# Altium PCB AirScoutPCBV2.0.PcbDoc
Units mm, origin at the board's own origin, x right, y up, seen from the top; angles counter-clockwise.
Board outline 70 x 95 mm, 4 copper layers (TOP, GND/S1, SRC/S2, BOTTOM), stack 0.603 mm thick; 62 components, 40 nets, 233 pads, 124 vias.
Unrouted connection lines stored in the file: 178.
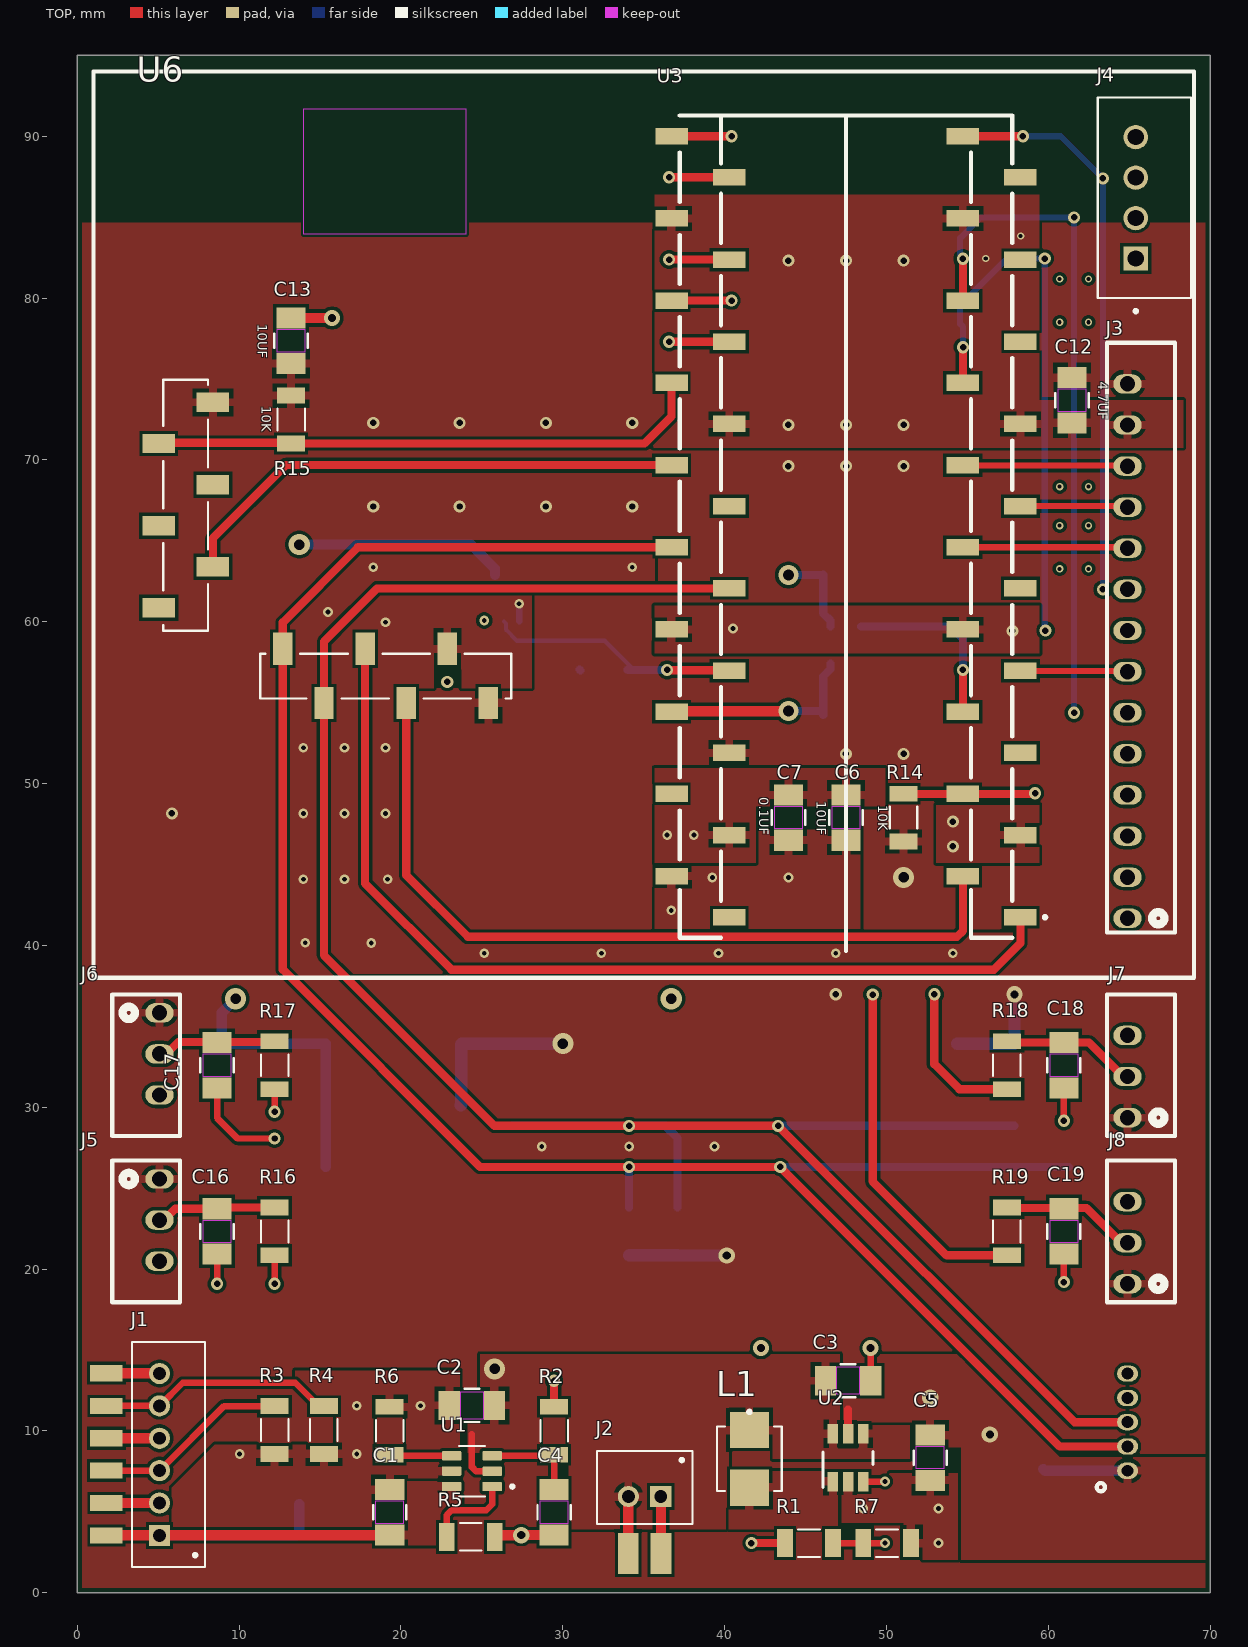
[diagram p0: TOP view]
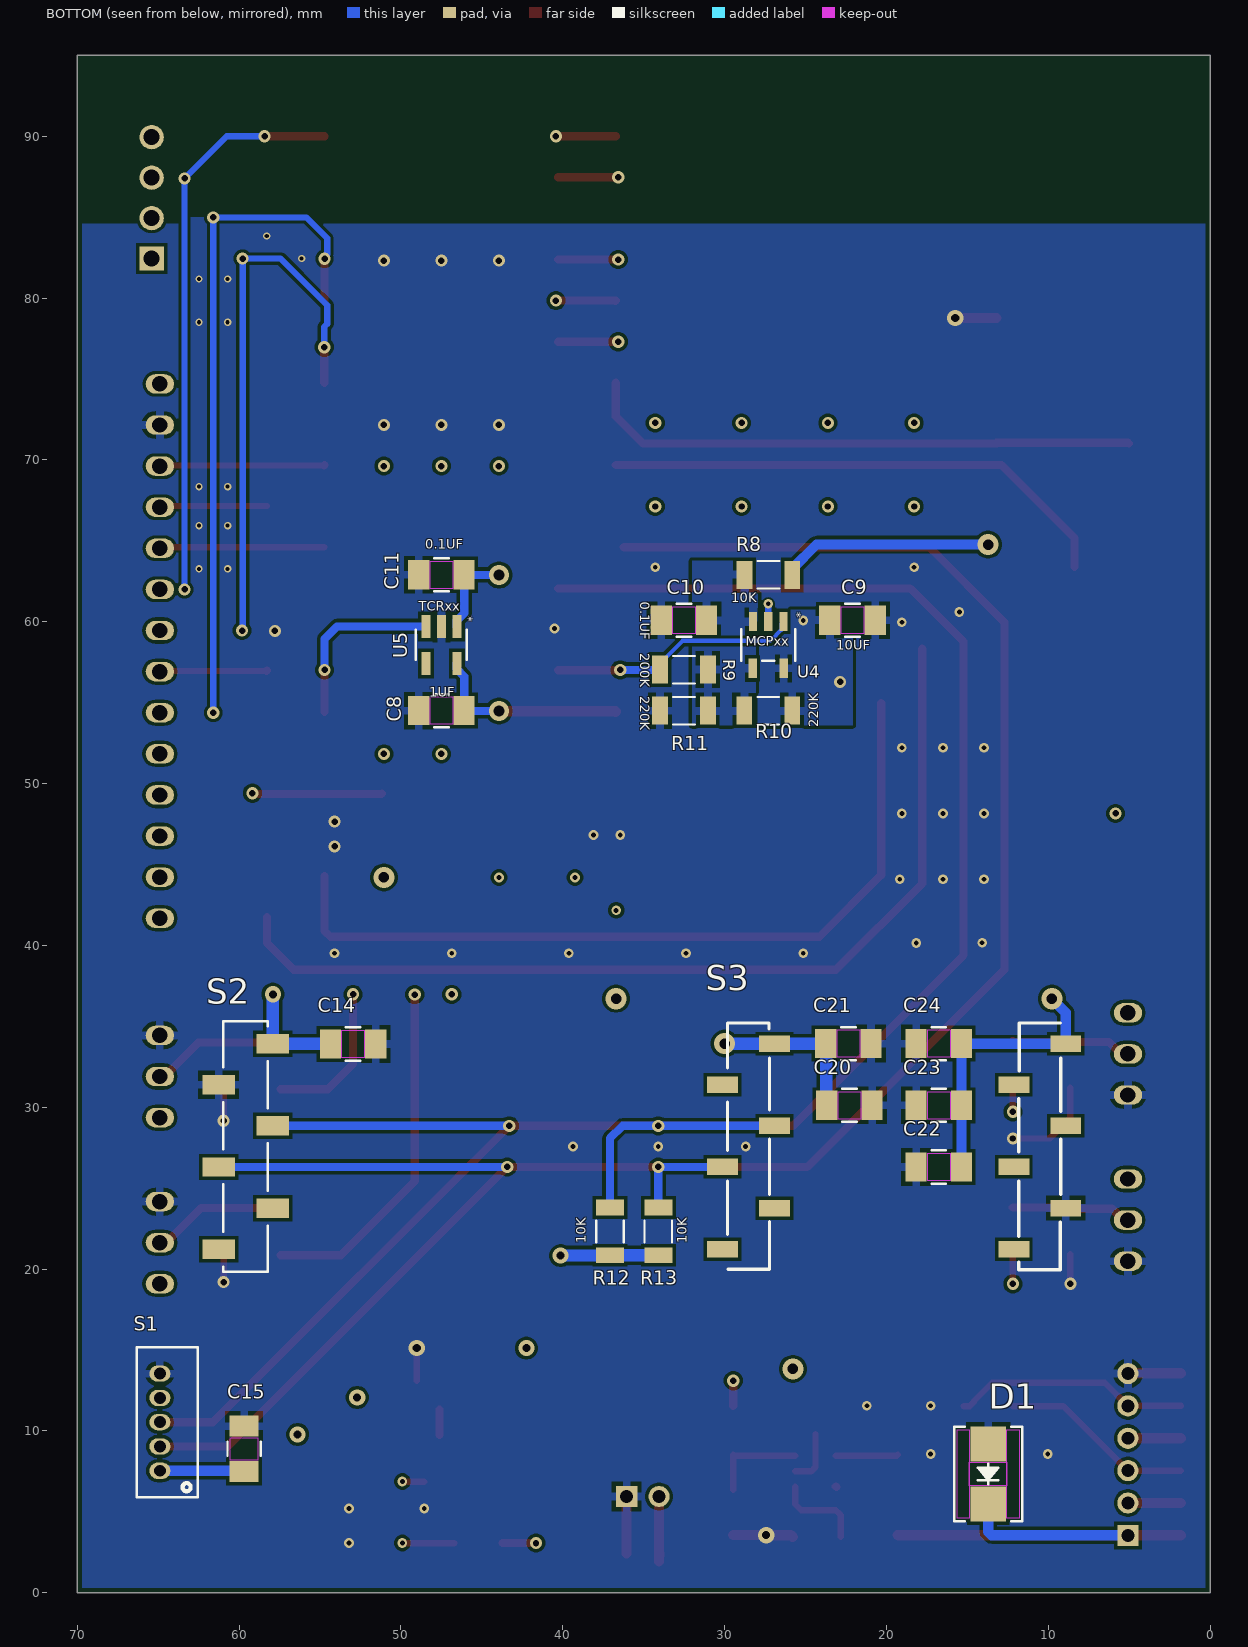
[diagram p1: BOTTOM view, seen from below]
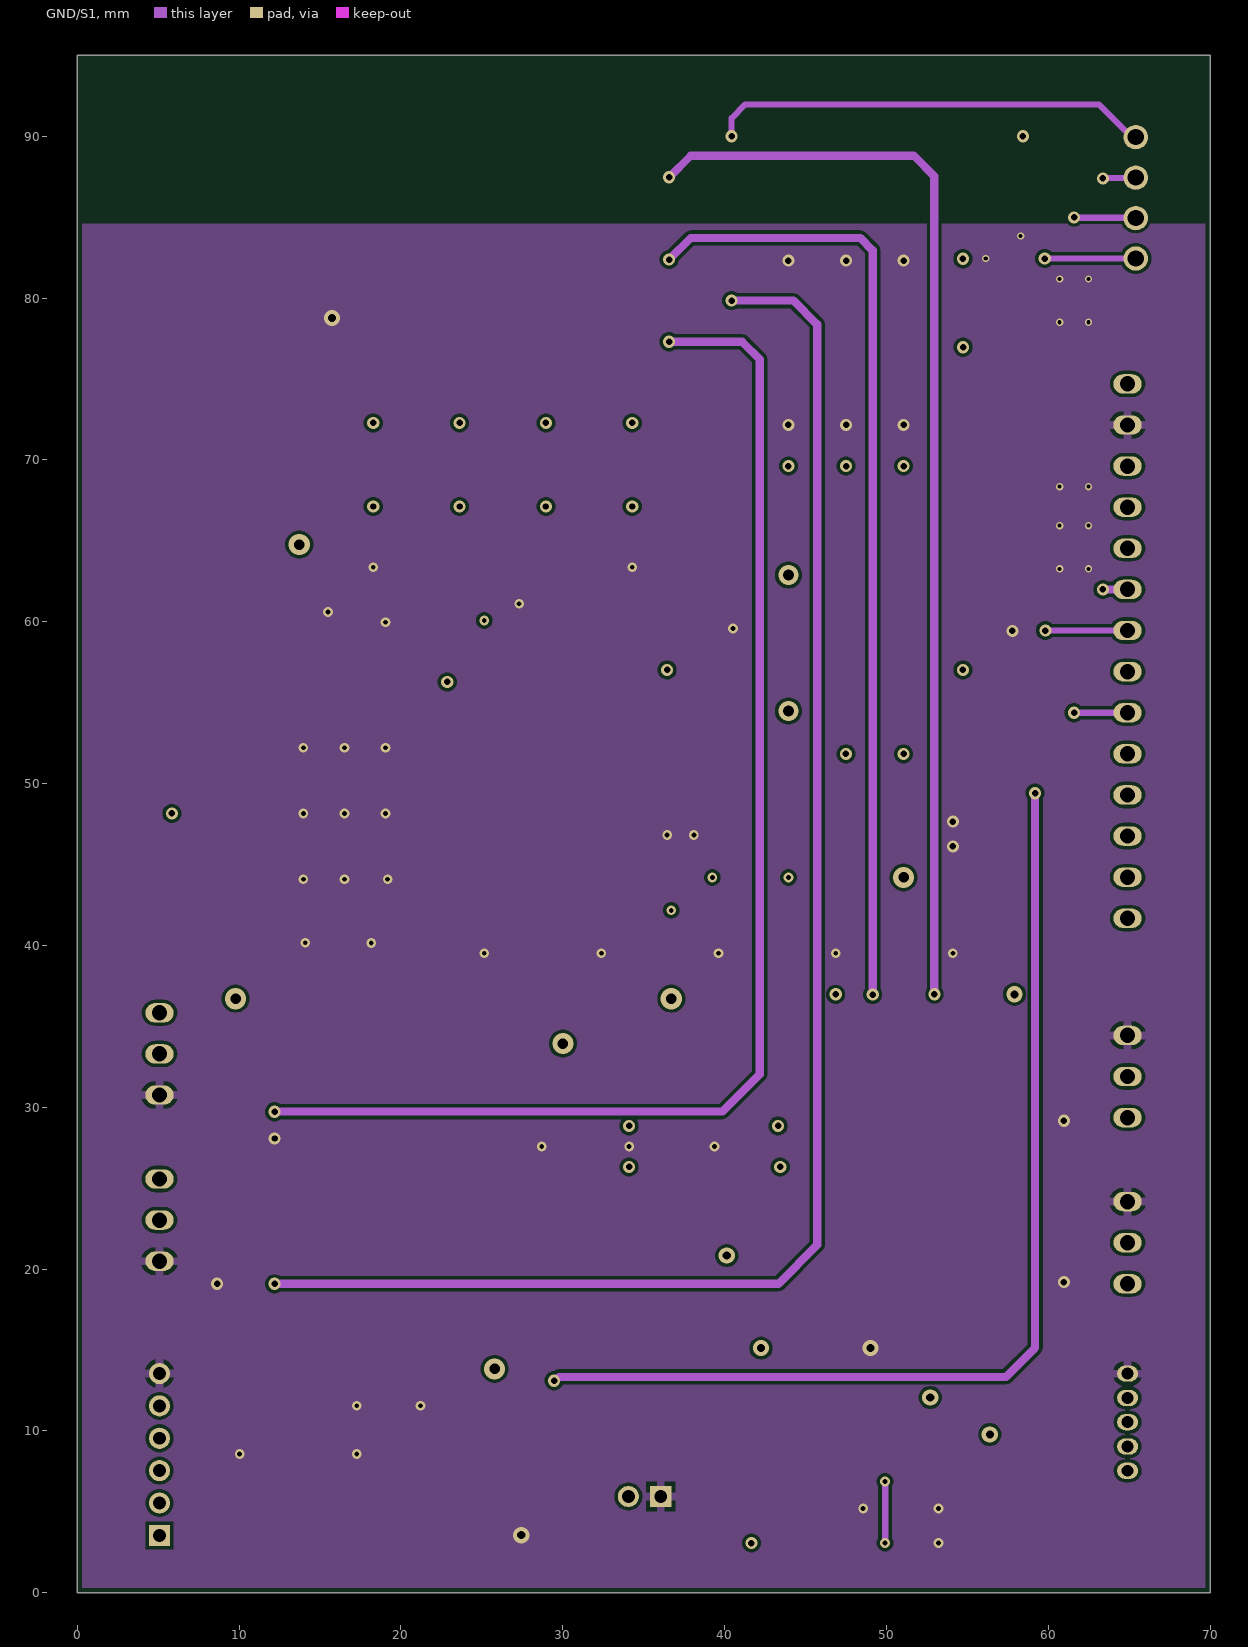
[diagram p2: GND/S1]
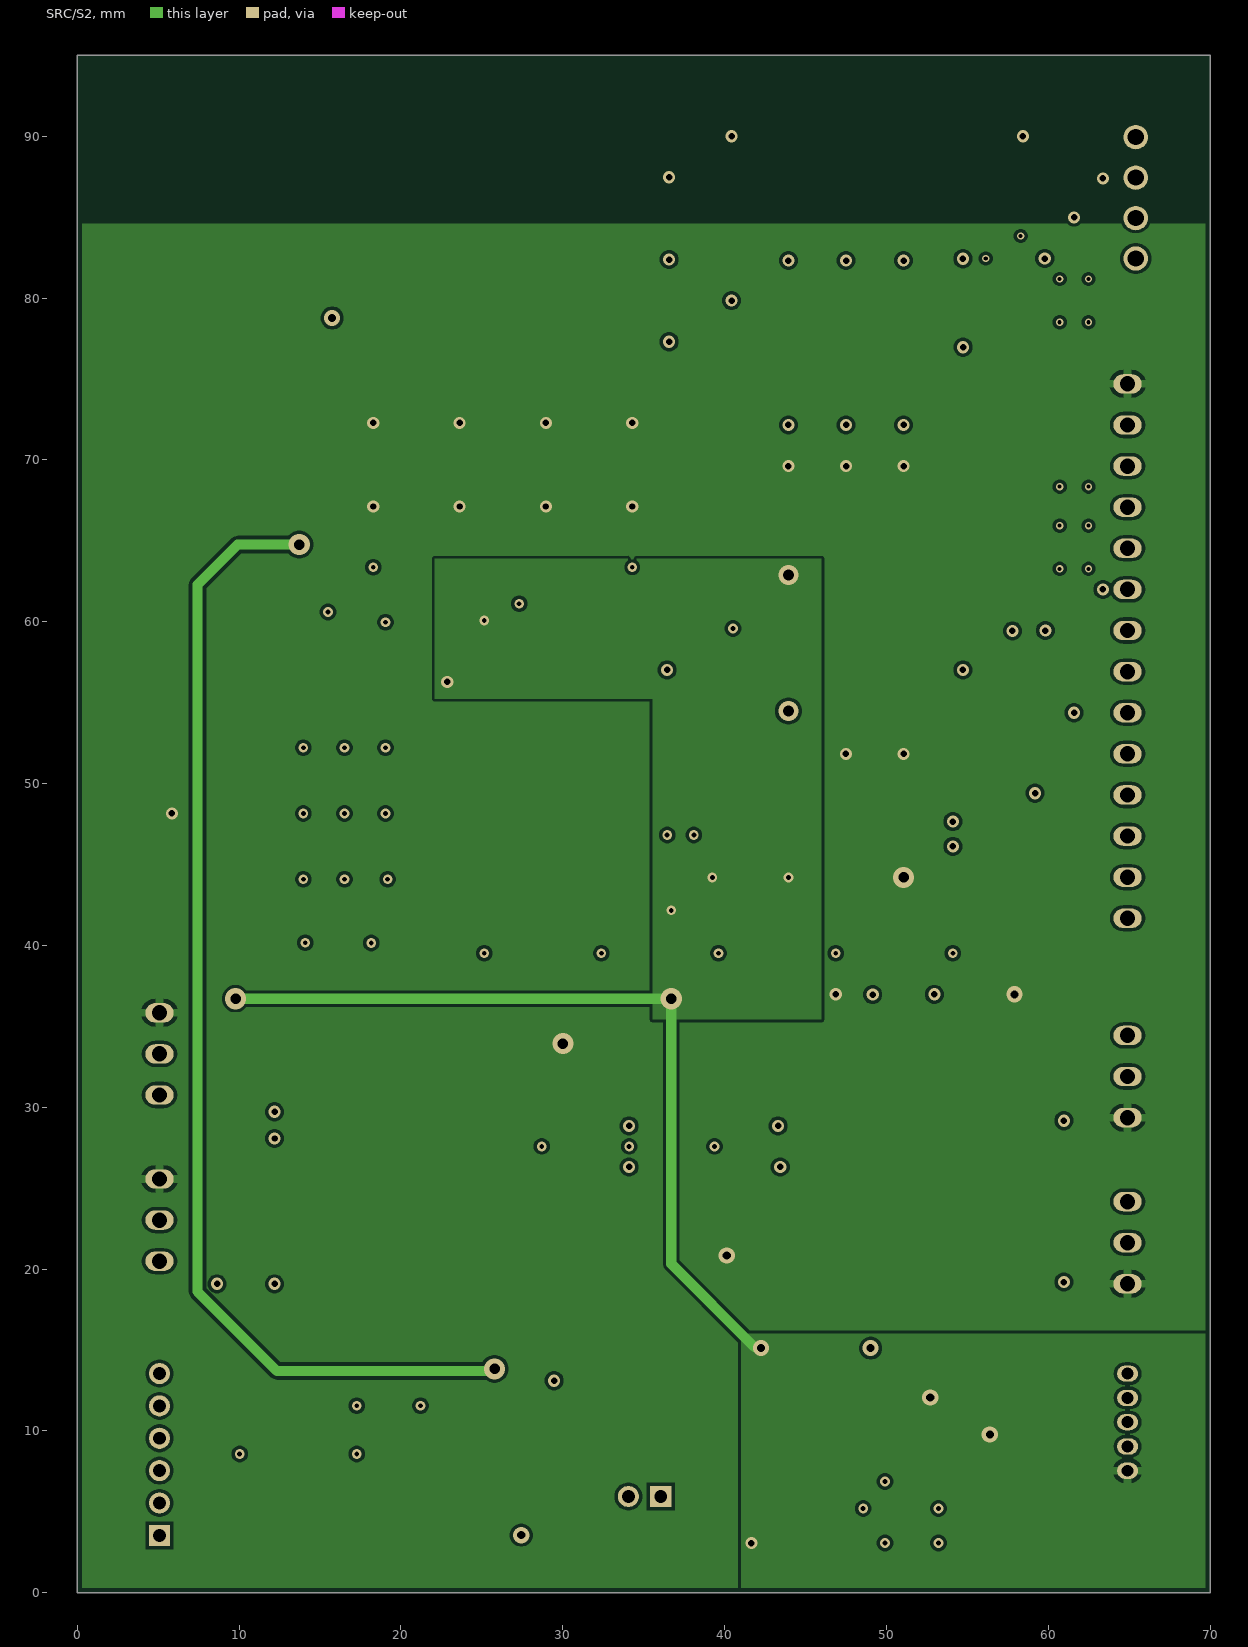
[diagram p3: SRC/S2]

## Layer stack, top to bottom
Top Solder: solder mask 0.0102, Solder Resist, Dk 3.5
TOP: signal copper 0.0356
Dielectric 2: prepreg 0.0711, PP-006, Dk 4.1
GND/S1: signal copper 0.035
Dielectric 1: dielectric 0.32, FR-4, Dk 4.8
SRC/S2: signal copper 0.035
Dielectric 3: prepreg 0.0711, PP-006, Dk 4.1
BOTTOM: signal copper 0.0356
Bottom Solder: solder mask 0.0102, Solder Resist, Dk 3.5

## Board outline
0,0 0,95 70,95 70,0

## Design rules (kind name [scope] priority, off if disabled: settings)
BoardOutlineClearance [All] p1: gap=0.3 ignorepadtopadclearanceinfootprint=FALSE except(0.4: Arc-SplitBarrior Arc-SplitContinuation Track-SplitBarrior Track-SplitContinuation SMDPad-SplitBarrior SMDPad-SplitContinuation THPad-SplitBarrior THPad-SplitContinuation Via-SplitBarrior Via-SplitContinuation Fill-SplitBarrior Fill-SplitContinuation Poly-SplitBarrior Poly-SplitContinuation Region-SplitBarrior Region-SplitContinuation Text-SplitBarrior Text-SplitContinuation)
Clearance "Clearance Different Nets" [All] p1: gap=0.2 ignorepadtopadclearanceinfootprint=FALSE except(0.089: Arc-Arc Arc-Track Arc-SMDPad Track-Track Track-SMDPad; 0.127: SMDPad-SMDPad SMDPad-Via THPad-Via Via-Via; 0.254: Arc-Via Arc-Text Track-Via Track-Text SMDPad-Text THPad-Text Via-Text Fill-Text Poly-Text Region-Text Text-Text; 0.5: THPad-THPad Via-Hole)
Clearance "Clearance Same Nets" [All] p2: gap=0.2 ignorepadtopadclearanceinfootprint=FALSE except(0.089: Arc-Arc Arc-Track Arc-SMDPad Track-Track Track-SMDPad SMDPad-SMDPad; 0.127: SMDPad-Via THPad-Via; 0.254: Arc-Via Arc-Text Track-Via Track-Text SMDPad-Text THPad-Text Via-Via Via-Text Fill-Text Poly-Text Region-Text Text-Text)
Clearance "Clearance Bottom Layer" [OnLayer('Bottom Layer')] p3: gap=0.203 ignorepadtopadclearanceinfootprint=TRUE except(0.254: Arc-Text Track-Text SMDPad-Text THPad-Text Via-Text Fill-Text Poly-Text Region-Text Text-Text)
Clearance "Clearance Top Layer" [OnLayer('Top Layer')] p4: gap=0.203 ignorepadtopadclearanceinfootprint=TRUE except(0.254: Arc-Text Track-Text SMDPad-Text THPad-Text Via-Text Fill-Text Poly-Text Region-Text Text-Text)
HoleSize [All] p1: absolutevalues=TRUE maxlimit=6.3 minlimit=0.2 maxpercent=80.000 minpercent=20.000
MinimumAnnularRing [All] p1: minimumring=0.13
MinimumSolderMaskSliver [All] p1: minsoldermaskwidth=0.1
PolygonConnect PolygonConnect_1 [All] p1: thpad.connectstyle=Relief thpad.reliefconductorwidth=0.508 thpad.reliefentries=4 thpad.polygonreliefangle="90 Angle" thpad.airgapwidth=0.254 smdpad.connectstyle=Relief smdpad.reliefconductorwidth=0.508 smdpad.reliefentries=4 smdpad.polygonreliefangle="90 Angle" smdpad.airgapwidth=0.254 via.connectstyle=Direct via.reliefconductorwidth=0.508 via.reliefentries=4 via.polygonreliefangle="90 Angle" via.airgapwidth=0.254
RoutingCorners [All] p1: cornerstyle=Round minsetback=2.54 maxsetback=2.54
RoutingVias [All] p1: holewidth=0.5 width=1 viastyle="Through Hole" minholewidth=0.2 minwidth=0.35 maxholewidth=1 maxwidth=2
SilkToSilkClearance [All] p1: silktosilkclearance=0.1
SilkToSolderMaskClearance [IsPad] p1: minsilkscreentomaskgap=0.1 clearancetoexposedcopper=TRUE
SolderMaskExpansion [All] p1: expansion=0.102 istentingtop=FALSE
SupplyNets "Schematic Supply Nets_30" [InNet('I2C/SCL')] p1: voltage=0.000
SupplyNets "Schematic Supply Nets_29" [InNet('SPI/CS-DIS')] p2: voltage=0.000
SupplyNets "Schematic Supply Nets_28" [InNet('VCC')] p3: voltage=0.000
SupplyNets "Schematic Supply Nets_27" [InNet('SPI/CS-SD')] p4: voltage=0.000
SupplyNets "Schematic Supply Nets_26" [InNet('VIN-')] p5: voltage=0.000
SupplyNets "Schematic Supply Nets_25" [InNet('5VCC')] p6: voltage=0.000
SupplyNets "Schematic Supply Nets_24" [InNet('CC1')] p7: voltage=0.000
SupplyNets "Schematic Supply Nets_23" [InNet('3V3')] p8: voltage=0.000
SupplyNets "Schematic Supply Nets_22" [InNet('FB')] p9: voltage=0.000
SupplyNets "Schematic Supply Nets_21" [InNet('UART/RX')] p10: voltage=0.000
SupplyNets "Schematic Supply Nets_20" [InNet('RST')] p11: voltage=0.000
SupplyNets "Schematic Supply Nets_19" [InNet('LED')] p12: voltage=0.000
SupplyNets "Schematic Supply Nets_18" [InNet('SPI/MISO')] p13: voltage=0.000
SupplyNets "Schematic Supply Nets_17" [InNet('ADC2')] p14: voltage=0.000
SupplyNets "Schematic Supply Nets_16" [InNet('GND')] p15: voltage=0.000
SupplyNets "Schematic Supply Nets_15" [InNet('UART/TX')] p16: voltage=0.000
SupplyNets "Schematic Supply Nets_14" [InNet('RESET')] p17: voltage=0.000
SupplyNets "Schematic Supply Nets_13" [InNet('I2C/SDA')] p18: voltage=0.000
SupplyNets "Schematic Supply Nets_12" [InNet('DC')] p19: voltage=0.000
SupplyNets "Schematic Supply Nets_11" [InNet('CONT')] p20: voltage=0.000
SupplyNets "Schematic Supply Nets_10" [InNet('TCH4')] p21: voltage=0.000
SupplyNets "Schematic Supply Nets_9" [InNet('3V3-REF')] p22: voltage=0.000
SupplyNets "Schematic Supply Nets_8" [InNet('TCH2')] p23: voltage=0.000
SupplyNets "Schematic Supply Nets_7" [InNet('TCH3')] p24: voltage=0.000
SupplyNets "Schematic Supply Nets_6" [InNet('TCH1')] p25: voltage=0.000
SupplyNets "Schematic Supply Nets_5" [InNet('CC2')] p26: voltage=0.000
SupplyNets "Schematic Supply Nets_4" [InNet('VBUS')] p27: voltage=0.000
SupplyNets "Schematic Supply Nets_3" [InNet('SPI/SCK')] p28: voltage=0.000
SupplyNets "Schematic Supply Nets_2" [InNet('EXTIN')] p29: voltage=0.000
SupplyNets "Schematic Supply Nets_1" [InNet('SPI/MOSI')] p30: voltage=0.000
SupplyNets "Schematic Supply Nets" [InNet('CHG')] p31: voltage=0.000
Width [All] p1: maxlimit=2.54 minlimit=0.089 preferedwidth=0.381
25 further rules are at their usual default settings.

## Components (designator, comment, footprint, x,y, rotation, side; value= is the part's Value field where it differs from the comment)
C1 "C1206C105K3RACTU" CAPC340180_140N_KEM 19.304,4.972 r270 top value=1uF
C2 "C1206C105K3RACTU" CAPC340180_140N_KEM 24.384,11.576 r0 top value=1uF
C3 "CL31B225KBHNNNE" CAPC340180_140N_KEM 47.625,13.1 r180 top value=2.2uF
C4 "C1206C104K5RACTU" CAPC340180_140N_KEM 29.464,4.972 r90 top value=0.1uF
C5 "CL31B475KBHNFNE" CAPC340180_140N_KEM 52.705,8.344 r90 top value=4.7uF
C6 "CL31B106KAHNNNE" CAPC340180_140N_KEM 47.498,47.898 r270 top value=10uF
C7 "C1206C104K5RACTU" CAPC340180_140N_KEM 43.942,47.898 r270 top value=0.1uF
C8 "C1206C105K3RACTU" CAPC340180_140N_KEM 47.498,54.502 r180 bottom value=1uF
C9 "CL31B106KAHNNNE" CAPC340180_140N_KEM 22.098,60.09 r0 bottom value=10uF
C10 "C1206C104K5RACTU" CAPC340180_140N_KEM 32.512,60.09 r180 bottom value=0.1uF
C11 "C1206C104K5RACTU" CAPC340180_140N_KEM 47.498,62.9 r180 bottom value=0.1uF
C12 "CL31B475KBHNFNE" CAPC340180_140N_KEM 61.468,73.685 r90 top value=4.7uF
C13 "CL31B106KAHNNNE" CAPC340180_140N_KEM 13.208,77.362 r270 top value=10uF
C14 "CL31B106KAHNNNE" CAPC340180_140N_KEM 52.959,33.909 r0 bottom value=10uF
C15 "CL31B106KAHNNNE" CAPC340180_140N_KEM 59.69,8.89 r270 bottom value=10uF
C16 "C1206C104K5RACTU" CAPC340180_140N_KEM 8.636,22.326 r90 top value=0.1uF
C17 "C1206C104K5RACTU" CAPC340180_140N_KEM 8.636,32.594 r90 top value=0.1uF
C18 "C1206C104K5RACTU" CAPC340180_140N_KEM 60.96,32.594 r90 top value=0.1uF
C19 "C1206C104K5RACTU" CAPC340180_140N_KEM 60.96,22.326 r90 top value=0.1uF
C20 "CL31B106KAHNNNE" CAPC340180_140N_KEM 22.289,30.118 r0 bottom value=10uF
C21 "C1206C104K5RACTU" CAPC340180_140N_KEM 22.352,33.928 r0 bottom value=0.1uF
C22 "CL31A476MQHNNNE" CAPC340180_140N_KEM 16.764,26.308 r180 bottom value=47uF
C23 "CL31B106KAHNNNE" CAPC340180_140N_KEM 16.764,30.118 r180 bottom value=10uF
C24 "C1206C104K5RACTU" CAPC340180_140N_KEM 16.764,33.928 r180 bottom value=0.1uF
D1 "SMBJ14CA-13-F" SMB_DIO 13.716,7.337 r90 bottom
J1 "B6B-PH-K-S" JST_B6B-PH-K-S 5.63,8.544 r270 top
J2 "B02B-PASK-1" JST_B2B-PH-K-S 35.052,6.496 r0 top
J3 "0705430013" CONN_14POL_SAMTEC 64.897,41.675 r270 top
J4 "4x1 vertical Connector Box" JST_B4B-XH-A 65.93,86.192 r270 top
J5 "0705430002" CONN_3POL_SAMTEC 5.08,25.565 r90 top
J6 "0705430002" CONN_3POL_SAMTEC 5.08,35.833 r90 top
J7 "0705430002" CONN_3POL_SAMTEC 64.897,29.356 r270 top
J8 "0705430002" CONN_3POL_SAMTEC 64.897,19.088 r270 top
L1 "PA4332.103NLT" IND_FDSD0420-H-100M=P3 41.529,8.274 r270 top
R1 "RC1206FR-0710KL" RESC3116X65N 45.212,3.067 r180 top value=10k
R2 "RC1206FR-0710KL" RESC3116X65N 29.464,10.008 r270 top value=10k
R3 "RMCF1206JT5K10" RESC3116X65N 12.192,10.052 r90 top value=5k1
R4 "RMCF1206JT5K10" RESC3116X65N 15.24,10.052 r90 top value=5k1
R5 "RC1206FR-0710KL" RESC3116X65N 24.307,3.448 r180 top value=10k
R6 "RNCP1206FTD1K00" RESC3116X65N 19.304,10.008 r270 top value=1k
R7 "RMCF1206JT56K0" RESC3116X65N 50.038,3.067 r180 top value=56k
R8 "RC1206FR-0710KL" RESC3116X65N 27.292,62.9 r180 bottom value=10k
R9 "RC1206JR-07200KL" RESC3116X65N 32.512,57.042 r0 bottom value=200k
R10 "RC1206JR-07220KL" RESC3116X65N 27.305,54.502 r180 bottom value=220k
R11 "RC1206JR-07220KL" RESC3116X65N 32.512,54.502 r180 bottom value=220k
R12 "RC1206FR-0710KL" RESC3116X65N 37.084,22.326 r270 bottom value=10k
R13 "RC1206FR-0710KL" RESC3116X65N 34.099,22.326 r270 bottom value=10k
R14 "RC1206FR-0710KL" RESC3116X65N 51.054,47.898 r270 top value=10k
R15 "RC1206FR-0710KL" RESC3116X65N 13.208,72.492 r90 top value=10k
R16 "RC1206FR-0710KL" RESC3116X65N 12.192,22.326 r270 top value=10k
R17 "RC1206FR-0710KL" RESC3116X65N 12.192,32.594 r270 top value=10k
R18 "RC1206FR-0710KL" RESC3116X65N 57.443,32.594 r270 top value=10k
R19 "RC1206FR-0710KL" RESC3116X65N 57.443,22.326 r270 top value=10k
S1 "B5B-ZR" CONN5_B5B-ZR_JST 64.897,7.536 r270 bottom
S2 "SSM-106-F-SV" PIM357 61.088,35.578 r270 bottom
S3 "SSM-106-F-SV" IFX-SMD-LG-MLGA-14-1-V_MODUL 31.379,18.428 r180 bottom locked
U1 "BQ21040DBVR" SOT95P280X145-6N 24.384,7.512 r180 top
U2 "TLV61046ADBVR" DBV0006A_M 47.625,8.344 r90 top
U3 "SSM-120-L-SV-BE-K-TR" "PicoW SC019" 47.5,66 r180 top locked
U4 "MCP6006T-E/OT" SOT23-5-AP2202K_DIO-M 27.305,58.566 r270 bottom
U5 "TCR2EF33,LM(CT" "SOT-25   SMV_TOS" 47.498,58.566 r270 bottom
U6 "FM20206VBNN; SSM-106-F-SV" CAM8MQ-Mod 5.006,91.952 r270 top

## Footprints (in the part's own frame and the unit in brackets; to place one, negate y for a bottom-side part, rotate by r counter-clockwise, add the part's x,y. Pads: shape width x height; smd on the part's side, far side on the other; paste and mask are expansions set on the pad)
CAM8MQ-Mod [mm] "For SMD Soldering"
  rect 1.2x2 smd paste+0 mask+0.025: 1(18.4,3.376) 2(20.94,0.024) 3(23.48,3.376) 4(26.02,0.024) 5(28.56,3.376) 6(31.1,0.024)
  rect 2x1.2 smd paste+0 mask+0.025: 7(36.976,20.4) 8(33.624,17.86) 9(36.976,15.32) 10(33.624,12.78) 11(36.976,10.24) 12(33.624,7.7)
  TOP keep-out region: 0.25,19 8,19 8,9 0.25,9
  silkscreen extent 17,0.3 36.7,21.8, body extent 17.14,-0.5 37.58,21.59, height 7.49
CAPC340180_140N_KEM [mm] "Caseform: 1206 Imperial; for Caps"
  rect 1.306x1.8 smd paste+0 mask+0: 1(-1.403,0) 2(1.403,0)
  TOP keep-out region: -0.699,-0.849 -0.699,0.849 0.699,0.849 0.699,-0.849
  silkscreen extent -0.44,-1.03 0.44,1.03, body extent -1.7,-0.9 1.7,0.9, height 1.4
CONN5_B5B-ZR_JST [mm]
  oval 1x1.3 hole 0.737 paste-2539.97: 1(0,0) 2(-1.5,0) 3(-3,0) 4(-4.5,0) 5(-6,0)
  silkscreen extent -7.62,-1.43 1.62,2.33, body extent -7.5,-1.24 1.5,2.26, height 4.5
CONN_3POL_SAMTEC [mm] "0705430013"
  oval 1.2x1.75 hole 0.95: 1(0,0) 2(-2.54,0) 3(-5.08,0)
  silkscreen extent -7.62,-1.27 1.14,2.92, body extent -7.23,-1.27 0.88,5.08, height 5.46
CONN_14POL_SAMTEC [mm] "0705430013"
  oval 1.2x1.75 hole 0.95: 1(0,0) 2(-2.54,0) 3(-5.08,0) 4(-7.62,0) 5(-10.16,0) 6(-12.7,0) 7(-15.24,0) 8(-17.78,0) 9(-20.32,0) 10(-22.86,0) 11(-25.4,0) 12(-27.94,0) 13(-30.48,0) 14(-33.02,0)
  silkscreen extent -35.56,-1.27 0.89,2.92, body extent -35.29,-1.27 0.75,5.08, height 5.97
DBV0006A_M [mm]
  rect 1.2x0.65 smd paste+0 mask+0.051: 1(-1.475,0.95) 2(-1.475,0) 3(-1.475,-0.95) 4(1.475,-0.95) 5(1.475,0) 6(1.475,0.95)
  silkscreen extent -1.83,-1.55 0.38,1.55, body extent -1.4,-1.45 1.4,1.45, height 1.2
IFX-SMD-LG-MLGA-14-1-V_MODUL [mm] "Module, 2.54 mm Pitch, 14 Pin, 14.00 mm W X 13.80 mm L X 7.68 mm H Body"
  rect 1.905x1.02 smd: 1(4.455,15.5) 2(1.25,12.96) 3(4.455,10.42) 4(1.25,7.88) 5(4.455,5.34) 6(22.455,5.34) 7(19.25,7.88) 8(22.455,10.42) 9(19.25,12.96) 10(22.455,15.5) 11(1.25,2.8) 12(19.25,2.8)
  silkscreen extent 1.55,1.53 22.15,16.77, body extent 0.77,1.52 22.96,16.76, height 15.3
IND_FDSD0420-H-100M=P3 [mm]
  rect 2.25x2.4 smd: 1(-1.778,0) 2(1.778,0)
  silkscreen extent -3,-2 2,2, body extent -2,-2 2,2, height 2
JST_B2B-PH-K-S [mm]
  round 1.308 hole 0.8: 1(-1,-0.55)
  rect 1.308x1.308 hole 0.8: 2(1,-0.55)
  silkscreen extent -2.95,-2.25 2.95,2.25, body extent -2.95,-2.25 2.95,2.25, height 6
JST_B4B-XH-A [mm]
  rect 1.508x1.508 / inner round 1.508 / far side rect 1.508x1.508 hole 1: 1(3.75,-0.525)
  round 1.508 hole 1: 2(1.25,-0.525) 3(-1.25,-0.525) 4(-3.75,-0.525)
  silkscreen extent -6.2,-2.88 7.1,2.88, body extent -6.2,-2.88 6.2,2.88, height 7
JST_B6B-PH-K-S [mm]
  rect 1.308x1.308 hole 0.8: 1(5,-0.55)
  round 1.308 hole 0.8: 2(3,-0.55) 3(1,-0.55) 4(-1,-0.55) 5(-3,-0.55) 6(-5,-0.55)
  silkscreen extent -6.95,-2.25 6.95,2.25, body extent -6.95,-2.25 6.95,2.25, height 6
"PicoW SC019" [mm] "For Description look into Schematics"
  rect 2x1.02 smd: 1(-10.778,24.26) 2(-7.222,21.72) 3(-10.778,19.18) 4(-7.222,16.64) 5(-10.778,14.1) 6(-7.222,11.56) 7(-10.778,9.02) 8(-7.222,6.48) 9(-10.778,3.94) 10(-7.222,1.4) 11(-10.778,-1.14) 12(-7.222,-3.68) 13(-10.778,-6.22) 14(-7.222,-8.76) 15(-10.778,-11.3) 16(-7.222,-13.84) 17(-10.778,-16.38) 18(-7.222,-18.92) 19(-10.778,-21.46) 20(-7.222,-24) 21(10.778,-24) 22(7.222,-21.46) 23(10.778,-18.92) 24(7.222,-16.38) 25(10.778,-13.84) 26(7.222,-11.3) 27(10.778,-8.76) 28(7.222,-6.22) 29(10.778,-3.68) 30(7.222,-1.14) 31(10.778,1.4) 32(7.222,3.94) 33(10.778,6.48) 34(7.222,9.02) 35(10.778,11.56) 36(7.222,14.1) 37(10.778,16.64) 38(7.222,19.18) 39(10.778,21.72) 40(7.222,24.26)
  silkscreen extent -12.4,-25.27 10.27,25.53, body extent -11.41,-25.5 11.16,26.8, height 11.23
PIM357 [mm] "With BME680 Sensor"
  rect 1.2x2 smd paste+0 mask+0.025: 1(1.65,3.176) 2(4.19,-0.176) 3(6.73,3.176) 4(9.27,-0.176) 5(11.81,3.176) 6(14.35,-0.176)
  silkscreen extent 0.25,0.1 15.75,2.87, body extent 0.38,-0.75 15.62,3.54, height 7.49
RESC3116X65N [mm] "Caseform: 1206 Imperial"
  rect 0.97x1.73 smd: 1(-1.48,0) 2(1.48,0)
  silkscreen extent -0.67,-0.85 0.67,0.85, body extent -1.55,-0.8 1.55,0.8, height 0.65
SMB_DIO [mm]
  rect 2.18x2.21 smd paste+0 mask+0: A(1.857,0) K(-1.857,0)
  TOP keep-out region: -0.716,-1.156 -0.716,1.156 0.716,1.156 0.716,-1.156
  TOP keep-out region: -2.744,1.156 -2.744,1.919 2.744,1.919 2.744,1.156
  TOP keep-out region: -2.744,-1.919 -2.744,-1.156 2.744,-1.156 2.744,-1.919
  silkscreen extent -2.92,-2.1 2.92,2.1, body extent -2.8,-1.97 2.8,1.97, height 2.45
SOT23-5-AP2202K_DIO-M [mil]
  rect 47.15x20 smd paste+0 mask+0: 1(-57.08,37) 2(-57.08,0) 3(-57.08,-37) 4(57.08,-37.5) 5(57.08,37.5)
  silkscreen extent -39,-66 39,66, body extent -59,-61 59,61, height 57
SOT95P280X145-6N [mm]
  rrect25% 1.21x0.58 smd: 1(-1.255,0.95) 2(-1.255,0) 3(-1.255,-0.95) 4(1.255,-0.95) 5(1.255,0) 6(1.255,0.95)
  silkscreen extent -2.6,-1.56 0.8,1.56, body extent -1.4,-1.45 1.4,1.45, height 1.45
"SOT-25   SMV_TOS" [mil]
  rect 56x22 smd paste+0 mask+0: 1(-45.06,37.4) 2(-45.06,0) 3(-45.06,-37.4) 4(45.06,-37.4) 5(45.06,37.4)
  silkscreen extent -37,-62 37,62, body extent -55,-57 55,57, height 45

## Part data
C1 C2 C8: library part CAP, "CAP CER 1UF 25V X7R 1206"
C3: library part CAP, "CAP CER 2.2UF 50V X7R 1206"
C4 C7 C10 C11 C16 C17 C18 C19 C21 C24: library part CAP, "CAP CER 0.1UF 50V X7R 1206"
C5 C12: library part CAP, "CAP CER 4.7UF 50V X7R 1206"
C6 C9 C13 C14 C15 C20 C23: library part CAP, "CAP CER 10UF 25V X7R 1206"
C22: library part CAP, "CAP CER 47UF 6.3V X5R 1206"
D1: library part Diode-Schottky, "TVS DIODE 14VWM 23.2VC SMB"
J1: library part CON6x1, "CONN HEADER VERT 6POS 2MM"
J2: library part CON2x1_vertical, "CONN HEADER VERT 2POS 2MM"
J3: library part CON7x2, "CONN HEADER VERT 14POS 2.54MM"
J4: library part "CON 4x1", "Can be used to create connectivity between two plates with cables or similar."
J5 J6 J7 J8: library part "CON 3x1", "CONN HEADER VERT 3POS 2.54MM"
L1: library part Inductor, "FIXED IND 10UH 2A 216 MOHM SMD;  / AIUR-05-100K"
R1 R2 R5 R8 R12 R13 R14 R15 R16 R17 R18 R19: library part RES, "RES 10K OHM 1% 1/4W 1206"
R3 R4: library part RES, "RES 5.1K OHM 5% 1/4W 1206"
R6: library part RES, "RES 1K OHM 1% 1/2W 1206"
R7: library part RES, "RES 56K OHM 5% 1/4W 1206"
R9: library part RES, "RES 200K OHM 5% 1/4W 1206"
R10 R11: library part RES, "RES 220K OHM 5% 1/4W 1206"
S1: library part "SPS30 Module", "Plug: CONN HEADER VERT 5POS 1.5MM; Air Sensor Dust Sensor Box SPS30 Module: 1649-1106-ND", ComponentLink1Description=Datasheet, ComponentLink1URL=https://sensirion.com/media/documents/8600FF88/64A3B8D6/Sensirion_PM_Sensors_Datasheet_SPS30.pdf, ComponentLink2Description="EU Component", ComponentLink2URL=https://www.digikey.at/en/products/detail/sensirion-ag/SPS30/9598990?gclsrc=aw.ds&gad_source=1&gad_campaignid=9415055229&gbraid=0AAAAADrbLlghU28cdFM9RQIiS448Os4NQ&gclid=Cj0KCQjwzt_FBhCEARIsAJGFWVladtv1vxGMu0RXHFTM9ng6qsDvV838Q-BR2Fl5FYFzWahIkC0y_aYaAqE3EALw_wcB
S2: library part "BME680 Module", "Header: CONN RCPT 6POS 0.1 GOLD SMD; Sensor: EVAL BOARD BME680 SENSOR - Gas, Feuchtigkeit, Druck, Temperatur Evaluierungsboards - Sensoren", ComponentLink1Description=Datasheet, ComponentLink1URL=chrome-extension://efaidnbmnnnibpcajpcglclefindmkaj/https://mm.digikey.com/Volume0/opasdata/d220001/medias/docus/854/PIM357_Web.pdf
S3: library part "PASCO2V15 Module", "(2x) CONN RCPT 6POS 0.1 GOLD SMD; Sensor: EVALCO25VMINIBOARDTOBO1; EVAL BOARD", Alternate View=No, ComponentLink1Description=Datasheet, ComponentLink1URL=chrome-extension://efaidnbmnnnibpcajpcglclefindmkaj/https://www.infineon.com/assets/row/public/documents/24/49/infineon-pasco2v01-datasheet-en.pdf?fileId=8ac78c8c80027ecd01809278f1af1ba2, Multiple Parts=No, Symbol Type="XENSIV PAS CO2 1.5"
U1: "OVP (Over-Voltage-Protection), SCP (Short-Circuit- Protection), OTP (Over - Temp. - Prot.); 1-cell, 0.8-A Li-ion and Li-polymer battery charger", Package="SOT-23-6 Texas Instruments", Check_prices=https://www.snapeda.com/parts/BQ21040DBVR/Texas+Instruments/view-part/?ref=eda, MF="Texas Instruments", MP=BQ21040DBVR, SnapEDA_Link=https://www.snapeda.com/parts/BQ21040DBVR/Texas+Instruments/view-part/?ref=snap
U2: "28-V Output Voltage Boost Converter with Power Diode and Isolation Switch 6-SOT-23 -40 to 125", Manufacturer_Name="Texas Instruments", Copyright="Copyright (C) 2025 Ultra Librarian. All rights reserved.", Manufacturer_Part_Number=TLV61046ADBVR, RefDes=RefDes, Type=TYPE
U3: library part "Raspberry PicoW SC019 Module", "(2x) CONN RCPT 20POS 0.1 GOLD SMD; PicoW: SC0918; RASPBERRY PI PICO W RP2040", ComponentLink1Description="EU Component", ComponentLink1URL=https://www.reichelt.at/at/de/shop/produkt/raspberry_pi_pico_rp2040_cortex-m0_microusb-295706, ComponentLink2Description=Datasheet, ComponentLink2URL=chrome-extension://efaidnbmnnnibpcajpcglclefindmkaj/https://datasheets.raspberrypi.com/picow/pico-w-datasheet.pdf
U4: "IC OPAMP GP 1 CIRCUIT SOT23-5"
U5: library part TCR2EF33,LMCT, "IC REG LINEAR 3.3V 200MA SMV", Manufacturer_Name="Toshiba Electronic Devices & Storage Corp.", Copyright="Copyright (C) 2025 Ultra Librarian. All rights reserved.", Manufacturer_Part_Number=TCR2EF33,LM(CT, RefDes=RefDes, Type=Type
U6: library part "CAM-M8Q Module", "(2x) RECEPTACLE, SMT, SINGLE ROW, .10; GPS - Module:  201880; CAM-M8Q-BREAKOUT MULTI GNSS MODU", ComponentLink1Description="Datasheet IC", ComponentLink1URL=chrome-extension://efaidnbmnnnibpcajpcglclefindmkaj/https://content.u-blox.com/sites/default/files/CAM-M8-FW3_DataSheet_%28UBX-15031574%29.pdf

## Free pads (board coordinates)
  rect 2x1 smd: 1(1.8,3.544) 1(1.8,5.544) 1(1.8,7.544) 1(1.8,9.544) 1(1.8,11.544) 1(1.8,13.567)
  rect 1.27x2.54 smd: 1(34.036,2.432) 1(36.068,2.432)

## Via types
v1: diameter 0.75, hole 0.4, TOP to BOTTOM, 56 vias
v2: diameter 0.6, hole 0.3, TOP to BOTTOM, 40 vias
v3: diameter 0.45, hole 0.25, TOP to BOTTOM, 12 vias
v4: diameter 1, hole 0.5, TOP to BOTTOM, 8 vias
v5: diameter 1.3, hole 0.65, TOP to BOTTOM, 6 vias
v6: diameter 1.25, hole 0.7, TOP to BOTTOM, 2 vias

## Nets (pads, with @x,y where several pads share a name; then routed paths per layer and width w, separated by ;. In a path a pad name is that pad's centre, name@x,y a point inside that pad or via, vN(x,y) a via of type N, cw(c..) or ccw(c..) an arc to the next point about the centre after c; other vN are vias at no path point)
3V3: C12.2 C13.2 C14.2 C20.2 C21.2 J3.14 J5.1 J6.1 J7.1 J8.1 R12.2 R13.2 R14.2 R15.2 S2.1 S3.1 U3.36 U6.1 U6.7 | length 22.7
  BOTTOM w0.762: C20.2 23.723,30.149 23.723,33.897 C21.2 S3.1 v5(30.002,33.928) ; R13.2 R12.2 37.093,20.837 40.123,20.837 v4(40.132,20.828) ; C14.2 54.371,33.918 57.903,33.918 S2.1 v4(57.912,36.976)
  other v1: 46.863,36.976 5.842,48.152 47.498,51.835 51.054,51.835 18.288,67.12 23.622,67.12 28.956,67.12 34.29,67.12 43.946,69.618 47.502,69.618 51.058,69.618 18.288,72.282 23.622,72.282 28.956,72.282 34.29,72.282
  other v5: 51.054,44.196
3V3-REF: C8.2 U3.35 U5.5 | length 12.8
  TOP w0.635: U3.35 36.743,54.461 43.92,54.461 v6(43.942,54.483)
  BOTTOM w0.508: v6(43.942,54.483) C8.2@46.076,54.483 ; C8.2@46.086,54.241 46.095,54.232 46.095,56.613 46.548,57.066 U5.5
5VCC: C5.2 C6.2 C7.2 C9.2 C11.2 C15.2 C22.2 C23.2 C24.2 R1.2 R10.2 S1.1 S3.10 U2.5 U3.39 U4.5 U5.1 | length 82.6
  TOP w0.508: v1(41.656,3.067) R1.2 ; U2.5@47.625,9.749 47.625,11.322
  SRC/S2 w0.635: v5(9.779,36.703) v5(36.703,36.703) 36.703,20.32 41.84,15.183 42.179,15.183 v4(42.248,15.113)
  BOTTOM w0.508: v6(43.942,62.881) 43.951,62.891 46.086,62.891 C11.2 46.095,60.519 46.548,60.066 U5.1
  BOTTOM w0.635: v5(9.779,36.703) 8.924,35.848 S3.10 C24.2 C23.2 C22.2 ; C15.2@59.69,7.639 59.793,7.536 S1.1
  other v1: 22.86,56.28
  other v2: 36.703,42.164 39.243,44.196 43.942,44.196 25.146,60.071
  other v4: 56.388,9.779 52.705,12.065
ADC2: R9.2 U3.34 U4.1 | length 15.7
  TOP w0.508: v1(36.449,57.023) 36.478,56.994 U3.34@40.278,56.994
  BOTTOM w0.254: U4.1 26.492,59.889 26.492,59.506 27.178,58.82 32.594,58.82 34.246,57.168 R9.2@34.246,57.042
  BOTTOM w0.508: R9.2 34.011,57.023 34.246,57.023 v1(36.449,57.023)
CC1: J1.3 pad.1@1.8,7.544 R3.2 | length 12
  TOP w0.4: pad.1@1.823,7.544 J1.3 9.068,11.532 R3.2
CC2: J1.5 pad.1@1.8,11.544 R4.2 | length 14.7
  TOP w0.4: pad.1@1.8,11.544 J1.5 6.509,12.973 13.462,12.973 14.575,11.86 14.575,11.817 14.86,11.532 R4.2
CHG: R2.1 R14.1 U3.4 | length 74.4
  TOP w0.508: R2.1@29.464,11.532 v1(29.464,13.1) ; R14.1@51.181,49.378 51.199,49.36 U3.4 59.139,49.36 v1(59.182,49.403)
  GND/S1 w0.508: v1(29.464,13.1) 29.525,13.1 29.76,13.335 57.385,13.335 59.182,15.132 v1(59.182,49.403)
CONT: U3.6 U5.3 | length 11.1
  TOP w0.508: U3.6 v1(54.722,57.027)
  BOTTOM w0.508: U5.3 53.955,59.71 54.722,58.943 v1(54.722,57.027)
DC: J3.10 U3.10 | length 10.5
  TOP w0.381: U3.10 J3.10@65.086,64.6
  TOP w0.508: J3.10@65.086,64.6 J3.10@65.151,64.535
EXTIN: U3.29 U6.5 | length 32
  TOP w0.508: U6.5 8.382,65.17 12.892,69.68 U3.29
FB: R1.1 R7.2 U2.3 | length 8.4
  TOP w0.4: R1.1 v2(49.911,3.067) ; U2.3 v2(49.911,6.869)
  GND/S1 w0.4: v2(49.911,3.067) v2(49.911,6.869)
GND: C1.1 C2.1 C3.1 C4.1 C5.1 C6.1 C7.1 C8.1 C9.1 C10.1 C11.1 C12.1 C13.1 C14.1 C15.1 C16.1 C17.1 C18.1 C19.1 C20.1 C21.1 C22.1 C23.1 C24.1 D1.A J1.6 J2.2 J3.13 J5.3 J6.3 J7.3 J8.3 pad.1@1.8,13.567 pad.1@36.068,2.432 R3.1 R4.1 R5.1 R6.1 R7.1 R11.1 S1.5 S2.2 S3.6 U1.5 U2.2 U3.3 U3.8 U3.13 U3.18 U3.23 U3.28 U3.33 U3.38 U4.2 U5.2 U6.8 | length 27.5
  TOP w0.4: J1.6@5.057,13.567 J1.6 ; v1(8.636,19.088) C16.1 ; C17.1 8.636,29.337 9.906,28.067 v1(12.192,28.067) ; J2.2 J2.2@36.068,5.93 ; v4(49.022,15.113) 49.022,13.106 C3.1 ; v1(60.96,19.196) C19.1 ; v1(60.96,29.165) C18.1@60.96,31.001
  TOP w0.635: pad.1@1.8,13.567 J1.6@5.057,13.567 ; C13.1 v4(15.748,78.765) ; R5.1 25.895,3.556 v4(27.432,3.556) ; v4@27.439,3.563 29.457,3.563 C4.1 ; pad.1@36.068,2.432 J2.2@36.068,5.93
  BOTTOM w0.4: U4.2 v2(27.305,61.106)
  other v1: 54.102,46.12 54.102,47.644 57.785,59.436 43.946,72.158 47.502,72.158 51.058,72.158 43.946,82.318 47.502,82.318 51.058,82.318
  other v2: 53.213,3.067 48.558,5.207 53.213,5.207 10.033,8.572 17.272,8.572 17.272,11.557 21.209,11.557 28.702,27.578 34.099,27.578 39.37,27.578 25.146,39.516 32.385,39.516 39.624,39.516 46.863,39.516 54.102,39.516 14.088,40.16 18.161,40.151 13.97,44.088 16.51,44.088 19.177,44.088 36.449,46.82 38.1,46.82 13.97,48.152 16.51,48.152 19.05,48.152 13.97,52.216 16.51,52.216 19.05,52.216 40.513,59.582 19.05,59.963 15.494,60.598 18.288,63.361 34.29,63.361
  other v3: 60.706,63.265 62.484,63.265 60.706,65.932 62.484,65.932 60.706,68.345 62.484,68.345 60.706,78.505 62.484,78.505 60.706,81.172 62.484,81.172 56.134,82.442 58.293,83.839
I2C/SCL: R12.1 S1.3 S2.3 S3.3 U3.32 U6.11 | length 136.8
  TOP w0.508: U3.32 18.524,62.06 15.246,58.782 U6.11 15.243,54.973 15.243,39.386 25.781,28.848 v1(34.099,28.848) v1(43.307,28.848) 61.619,10.536 S1.3
  BOTTOM w0.508: S3.3 v1(34.099,28.848) 34.103,28.851 36.319,28.851 37.084,28.086 R12.1 ; v1(43.307,28.848) S2.3
I2C/SDA: R13.1 S1.2 S2.4 S3.4 U3.31 U6.12 | length 135.6
  TOP w0.508: U3.31@36.232,64.6 17.337,64.6 12.7,59.963 12.7,58.328 12.7,38.5 24.892,26.308 v1(34.099,26.308) v1(43.434,26.308) 60.706,9.036 S1.2
  BOTTOM w0.508: S3.4 v1(34.099,26.308) R13.1 ; v1(43.434,26.308) S2.4
LED: J3.7 U3.7 | length 7.2
  TOP w0.381: U3.7@58.311,56.947 J3.7@65.373,56.947
  TOP w0.508: U3.7 U3.7@58.311,56.947 ; J3.7@65.373,56.947 J3.7@65.405,56.915
NetC4_2: C4.2 R2.2 U1.3 | length 6
  TOP w0.4: U1.3 29.398,8.462 R2.2 C4.2
NetC10_2: C10.2 R8.1 U4.3
NetC16_2: C16.2 J5.2 R16.1 | length 7.4
  TOP w0.508: J5.2 5.355,23.025 6.059,23.729 C16.2 8.713,23.806 R16.1
NetC17_2: C17.2 J6.2 R17.1 | length 7.4
  TOP w0.508: J6.2 5.496,33.293 6.239,34.036 8.636,34.036 12.153,34.036 R17.1
NetC18_2: C18.2 J7.2 R18.1 | length 8.4
  TOP w0.508: R18.1 57.52,33.997 62.521,33.997 64.622,31.896 J7.2
NetC19_2: C19.2 J8.2 R19.1 | length 8.4
  TOP w0.508: R19.1 57.481,23.768 60.921,23.768 C19.2 60.999,23.768 62.357,23.768 64.497,21.628 J8.2
NetL1_2: L1.2 U2.1
NetR5_2: R5.2 U1.1 | length 5.5
  TOP w0.4: R5.2 22.827,4.796 23.13,5.099 25.273,5.099 25.639,5.465 U1.1
NetR6_2: R6.2 U1.4 | length 3.9
  TOP w0.4: R6.2 19.37,8.462 U1.4
RESET: R15.1 U3.27 U6.2 | length 34.5
  TOP w0.508: U6.2 5.077,71.06 R15.1@13.208,71.06 ; R15.1 35.052,71.012 36.722,72.682 U3.27
RST: J3.11 U3.11 | length 7.2
  TOP w0.381: U3.11 J3.11@64.624,67.14
  TOP w0.508: J3.11@64.624,67.14 64.816,66.948 65.024,66.948 J3.11@65.278,67.202
SPI/CS-DIS: J3.12 U3.12 | length 10.5
  TOP w0.381: U3.12@54.755,69.647 J3.12@65.119,69.647
  TOP w0.508: U3.12 U3.12@54.755,69.647 ; J3.12@65.119,69.647 J3.12@65.151,69.615
SPI/CS-SD: J4.4 U3.21 | length 30.7
  TOP w0.508: U3.21 v1(40.426,90)
  GND/S1 w0.381: v1(40.426,90) 40.426,91.118 41.275,91.967 63.126,91.967 J4.4@65.151,89.942
SPI/MISO: J3.6 J4.2 U3.16 | length 49.2
  TOP w0.508: U3.16 v1(54.722,82.427)
  GND/S1 w0.381: v1(61.595,54.375) J3.6 ; v1(61.595,84.982) 61.615,84.962 65.385,84.962 J4.2
  BOTTOM w0.381: v1(54.722,82.427) 54.722,82.527 54.554,82.695 54.554,83.697 55.839,84.982 v1(61.595,84.982) v1(61.595,54.375)
SPI/MOSI: J3.9 J4.3 U3.20 | length 39.2
  TOP w0.508: U3.20 v1(58.426,90)
  GND/S1 w0.381: v1(63.373,87.395) 63.397,87.418 65.381,87.418 J4.3
  GND/S1 w0.508: v1(63.373,61.995) J3.9@65.405,61.995
  BOTTOM w0.381: v1(58.426,90) 60.768,90 v1(63.373,87.395) v1(63.373,61.995)
SPI/SCK: J3.8 J4.1 U3.14 | length 45.2
  TOP w0.508: U3.14 54.737,74.775 v1(54.737,76.962)
  GND/S1 w0.381: v1(59.78,82.442) J4.1@65.151,82.442 ; v1(59.817,59.455) J3.8@65.405,59.455
  BOTTOM w0.381: v1(54.737,76.962) 54.737,78.216 54.554,78.399 54.554,79.554 57.442,82.442 v1(59.78,82.442) ; v1@59.78,82.352 59.78,59.492 v1(59.817,59.455)
TCH1: R16.2 U3.25 | length 102.8
  TOP w0.4: v1(12.192,19.088) R16.2
  TOP w0.508: U3.25@36.74,79.822 U3.25 v1(40.426,79.84)
  GND/S1 w0.508: v1(12.192,19.088) 43.326,19.088 45.72,21.482 45.72,39.389 ; v1(40.426,79.84) 44.258,79.84 45.72,78.378 45.72,39.399
TCH2: R17.2 U3.26 | length 86.3
  TOP w0.4: v1(12.192,29.718) R17.2
  TOP w0.508: v1(36.574,77.3) U3.26
  GND/S1 w0.508: v1(12.192,29.718) 12.205,29.731 39.872,29.731 42.164,32.023 42.164,76.219 41.083,77.3 v1(36.574,77.3)
TCH3: R18.2 U3.22 | length 81.2
  TOP w0.508: v1(36.574,87.46) U3.22 ; v1@52.959,37.103 52.959,32.658 54.502,31.114 R18.2
  GND/S1 w0.508: v1(36.574,87.46) 37.906,88.792 51.689,88.792 52.959,87.522 v1@52.959,37.018
  other v1: 52.959,36.976
TCH4: R19.2 U3.24 | length 84.9
  TOP w0.508: v1(36.574,82.38) U3.24 ; v1(49.149,36.957) 49.149,25.419 53.722,20.846 R19.2
  GND/S1 w0.508: v1(36.574,82.38) 37.906,83.712 48.387,83.712 49.149,82.95 v1(49.149,36.957)
UART/RX: U3.2 U6.9 | length 50.1
  TOP w0.508: U6.9 20.326,44.336 24.13,40.532 54.356,40.532 54.722,40.898 U3.2
UART/TX: U3.1 U6.10 | length 59.5
  TOP w0.508: U6.10 17.786,43.828 23.114,38.5 56.642,38.5 58.278,40.136 U3.1
VBUS: C1.2 D1.K J1.1 pad.1@1.8,3.544 U1.6 | length 28
  TOP w0.508: U1.6@23.093,6.526 U1.6
  TOP w0.635: pad.1@1.823,3.544 J1.1 5.093,3.557 19.291,3.557 C1.2
  BOTTOM w0.635: J1.1 13.504,3.544 13.716,3.756 D1.K
VCC: C2.2 C3.2 J2.1 L1.1 pad.1@34.036,2.432 R8.2 U1.2 U2.4 U2.6 | length 92.4
  TOP w0.4: 24.384,9.798 24.384,7.766 24.638,7.512 U1.2
  TOP w0.635: pad.1@34.036,2.432 34.052,1.94 J2.1
  SRC/S2 w0.635: v5(13.716,64.77) 9.906,64.77 7.429,62.293 7.429,18.606 12.334,13.701 25.654,13.701 v5(25.781,13.828)
  BOTTOM w0.635: v5(13.716,64.77) 24.322,64.77 25.812,63.28 R8.2
VIN-: R9.1 R10.1 R11.2 U4.4 | length 0.1
  BOTTOM w0.508: R9.1 R9.1@31.094,56.98
pads on no net: J1.2 J1.4 J3.1 J3.2 J3.3 J3.4 J3.5 S1.4 S2.5 S2.6 S3.2 S3.5 S3.7 S3.8 S3.9 S3.11 S3.12 U3.5 U3.9 U3.15 U3.17 U3.19 U3.30 U3.37 U3.40 U5.4 U6.3 U6.4 U6.6
copper on no net: | length 6.5
  TOP w0.635: 1.823,5.544 5.08,5.544 ; 1.823,9.544 5.08,9.544

## Polygon pours and split planes (outlines as drawn)
3V3 on TOP "3V3_L01_P086" (solid, pour order 86): 0,84.649 70,84.649 70,0.067 0,0.067
VCC on TOP "VCC_L01_P082" (solid, pour order 82): 28.575,14.732 39.116,14.732 39.116,12.116 39.116,12.173 38.827,12.173 28.575,12.173
5VCC on TOP "5VCC_L01_P003" (solid, pour order 3): 54.61,14.477 60.705,8.382 70.104,8.382 70.104,2.032 54.61,2.032
5VCC on TOP "5VCC_L01_P009" (solid, pour order 9): 47.117,10.541 47.117,14.732 52.052,14.732 52.052,10.541
VCC on TOP "VCC_L01_P008" (solid, pour order 8): 47.117,14.732 34.925,14.732 34.925,8.909 47.117,8.909
NetL1_2 on TOP "NETL1_2_L01_P055" (solid, pour order 55): 46.99,7.512 46.99,3.937 40.259,3.937 40.259,7.512
GND on TOP "GND_L01_P083" (solid, pour order 83): 18.288,13.716 13.462,13.716 13.462,13.335 14.732,12.065 16.002,12.065 16.002,9.144 8.509,9.144 5.842,6.477 5.842,3.937 18.415,3.937 18.415,5.631 18.455,5.671 23.876,5.671 23.876,8.255 18.288,8.255 18.288,10.814
VBUS on TOP "VBUS_L01_P068" (solid, pour order 68): 23.749,4.337 23.749,6.877 20.32,6.877 20.153,6.71 20.153,4.273 18.455,4.273 18.415,4.233 18.415,2.921 22.225,2.921 22.225,4.337
VCC on TOP "VCC_L01_P073" (solid, pour order 73): 30.353,13.97 40.259,13.97 40.259,3.937 30.353,3.937
GND on TOP "NONET_L-01_P-001" (solid, pour order 10): 53.086,48.66 59.436,48.66 59.436,45.104 53.086,45.104
GND on TOP "GND_L01_P069" (solid, pour order 69): 15.391,59.836 15.391,39.238 25.781,28.848 43.307,28.848 61.619,10.536 64.897,10.536 64.897,9.036 60.706,9.036 43.434,26.308 24.892,26.308 12.7,38.5 12.7,59.836
GND on TOP "NONET_L-01_P-001" (solid, pour order 12): 35.687,45.104 35.687,50.946 41.91,50.946 41.91,45.104
GND on TOP "NONET_L-01_P-001" (solid, pour order 14): 15.367,59.836 20.066,59.836 20.066,44.342 24.13,40.278 54.356,40.278 54.864,40.786 57.912,40.786 57.912,40.024 56.134,38.246 17.018,38.246 15.367,39.897
5VCC on TOP "NONET_L-01_P-001" (solid, pour order 17): 41.91,47.136 48.387,47.136 48.387,41.04 35.687,41.04 35.687,45.104 41.91,45.104
GND on TOP "NONET_L-01_P-001" (solid, pour order 30): 43.347,48.597 49.911,48.597 49.911,50.946 48.26,50.946 41.91,50.946 41.91,48.597
GND on TOP "NONET_L-01_P-001" (solid, pour order 31): 35.687,60.979 59.436,60.979 59.436,58.058 35.687,58.058
GND on TOP "NONET_L-01_P-001" (solid, pour order 32): 68.326,70.761 35.56,70.761 35.56,73.682 68.326,73.682
GND on TOP "NONET_L-01_P-001" (solid, pour order 33): 35.687,86.379 59.436,86.379 59.436,73.552 35.687,73.552
GND on TOP "GND_L01_P048" (solid, pour order 48): 16.046,59.582 12.827,59.582 17.845,64.6 35.687,64.6 35.687,62.122 18.586,62.122
GND on TOP "GND_L01_P052" (solid, pour order 52): 16.383,59.582 18.796,61.995 28.067,61.995 28.067,55.899 18.542,55.899 18.542,59.582
5VCC on TOP "5VCC_L01_P053" (solid, pour order 53): 51.689,8.973 51.689,14.732 54.726,14.732 55.975,8.973
VCC on TOP "VCC_L01_P054" (solid, pour order 54): 46.99,10.687 45.525,10.687 45.593,10.619 45.593,8.909 42.983,8.909 42.983,8.274 51.435,8.274 51.435,10.433 48.26,10.433 48.26,8.909 46.99,8.909
GND on TOP "GND_L01_P056" (solid, pour order 56): 47.244,7.385 47.244,4.337 51.054,4.337 51.054,2.051 54.483,2.051 54.483,7.385
NetL1_2 on TOP "NETL1_2_L01_P057" (solid, pour order 57): 43.053,7.258 43.053,4.337 40.259,4.337 40.259,7.258
VCC on TOP "VCC_L01_P059" (solid, pour order 59): 24.13,10.433 24.13,8.655 28.575,8.655 28.575,14.732 24.892,14.732 24.892,10.433
GND on TOP "GND_L01_P067" (solid, pour order 67): 23.622,13.716 23.622,8.782 20.32,8.782 20.32,10.941 18.161,10.941 18.161,13.716
GND on BOTTOM "GND_L04_P076" (solid, pour order 76): 0,84.582 70,84.582 70,0 0,0
GND on BOTTOM "GND_L04_P042" (solid, pour order 42): 54.722,78.871 58.293,82.442 60.198,82.442 60.198,61.614 63.754,61.614 63.754,84.982 56.007,84.982 54.722,83.697
VIN- on BOTTOM "NONET_L-01_P-001" (solid, pour order 21): 28.067,53.594 28.067,58.439 32.004,58.439 32.004,53.594
NetC10_2 on BOTTOM "NONET_L-01_P-001" (solid, pour order 22): 27.94,60.852 27.94,58.82 32.004,58.82 32.004,63.754 27.94,63.754
5VCC on BOTTOM "NONET_L-01_P-001" (solid, pour order 23): 22.098,60.725 22.098,53.594 27.94,53.594 27.94,60.725
3V3 on SRC/S2 "3V3_L03_P085" (solid, pour order 85): 0.005,84.582 70.005,84.582 70.005,-0.042 0.005,-0.042
5VCC on SRC/S2 "5VCC_L03_P081" (solid, pour order 81): 22.098,63.881 45.974,63.881 45.974,35.433 35.56,35.433 35.56,55.245 22.098,55.245
5VCC on SRC/S2 "5VCC_L03_P074" (solid, pour order 74): 41.021,16.002 41.021,0 70,0 70,16.002
GND on GND/S1 "GND_L02_P075" (solid, pour order 75): 0,84.582 70,84.582 70,0 0,0

## Other copper
TOP:
  pour cut-out: 22.012,55.88 22.012,56.048 22.012,57.074 23.72,57.074 23.749,57.045 23.749,55.88

## Silkscreen, mask and mechanical layers (free items; w line width, h text height)
Top Overlay:
  lines w0.254: 39.77,91.27 55.23,91.27 ; 47.498,39.643 47.5,39.645 47.5,91.27 ; 1,38 69,38 69,94 1,94 1,38
  text "10UF" at 10.922,78.378 h1 r270
  text "4.7UF" at 62.865,74.822 h1 r270
  text "10K" at 11.176,73.298 h1 r270
  text "0.1UF" at 41.91,49.168 h1 r270
  text "10UF" at 45.466,48.914 h1 r270
  text "10K" at 49.276,48.66 h1 r270
Bottom Overlay:
  text "0.1UF" at 48.514,64.281 h1
  text "0.1UF" at 35.433,61.233 h1 r90
  text "10K" at 29.591,60.979 h1
  text "TCRxx" at 48.895,60.471 h1
  text "MCPxx" at 28.702,58.312 h1
  text "10UF" at 23.114,58.058 h1
  text "200K" at 35.433,58.058 h1 r90
  text "220K" at 35.433,55.391 h1 r90
  text "1UF" at 48.26,55.137 h1
  text "220K" at 24.003,53.486 h1 r270
  text "10K" at 32.131,21.609 h1 r270
  text "10K" at 38.354,21.609 h1 r270
Mechanical 15:
  lines w0.254: 35,0 35,94 ; 0,0 70,0 70,95 0,95 0,0

## Text inside footprints (layer, text, board x,y; h text height)
U4: Bottom Overlay "*" at 25.781,60.598 h0.51 r90; Mechanical 13 "*" at 25.781,60.598 h0.51 r90
U5: Bottom Overlay "*" at 46.101,60.344 h0.51 r90; Mechanical 13 "*" at 46.101,60.344 h0.51 r90
U6: Mechanical 3 "GPS-Module" at 19.26,79.798 h1.52 r270